# Altium PCB Glove_Row.PcbDoc (part 1 of 2)
Units mm, origin at the board's own origin, x right, y up, seen from the top; angles counter-clockwise.
Board outline 47.7 x 64 mm, 2 copper layers (Top Layer, Bottom Layer); 61 components, 194 nets, 577 pads, 247 vias.
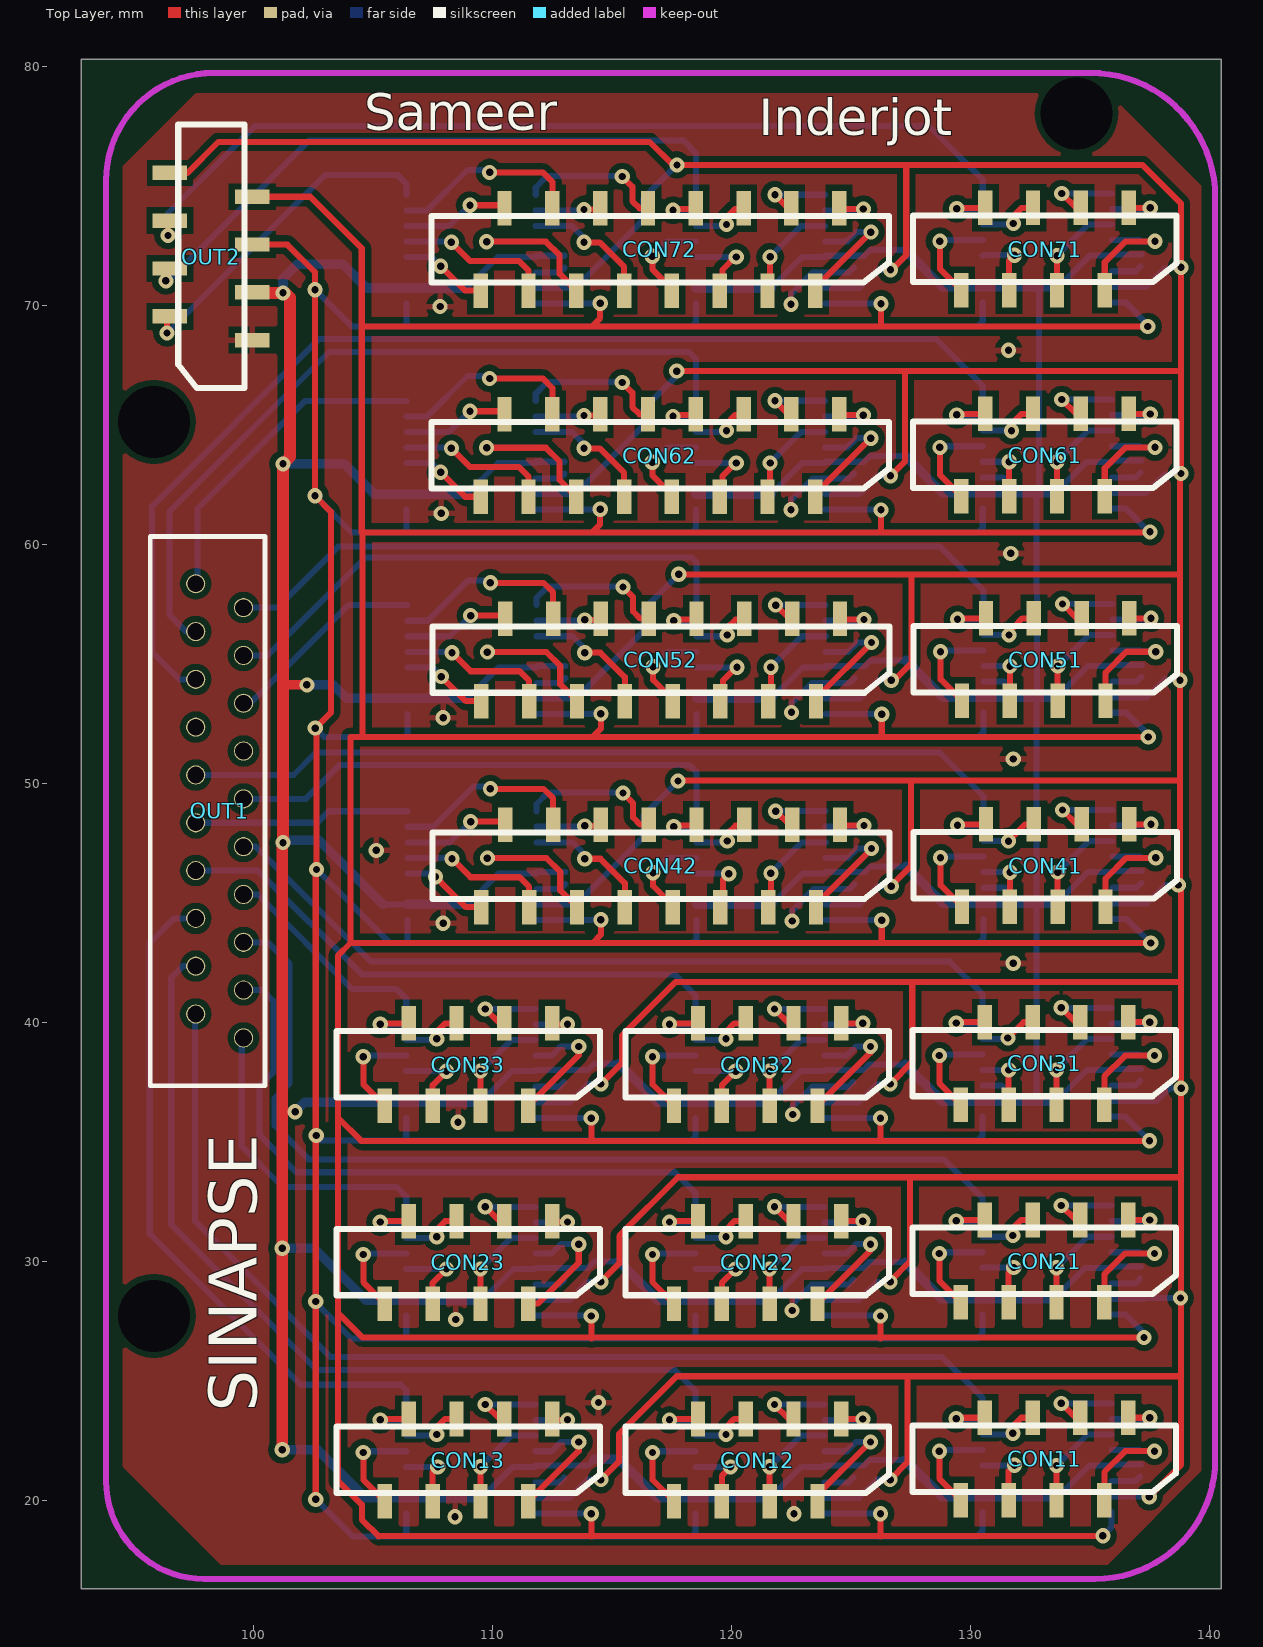
[diagram p0: Top Layer view]
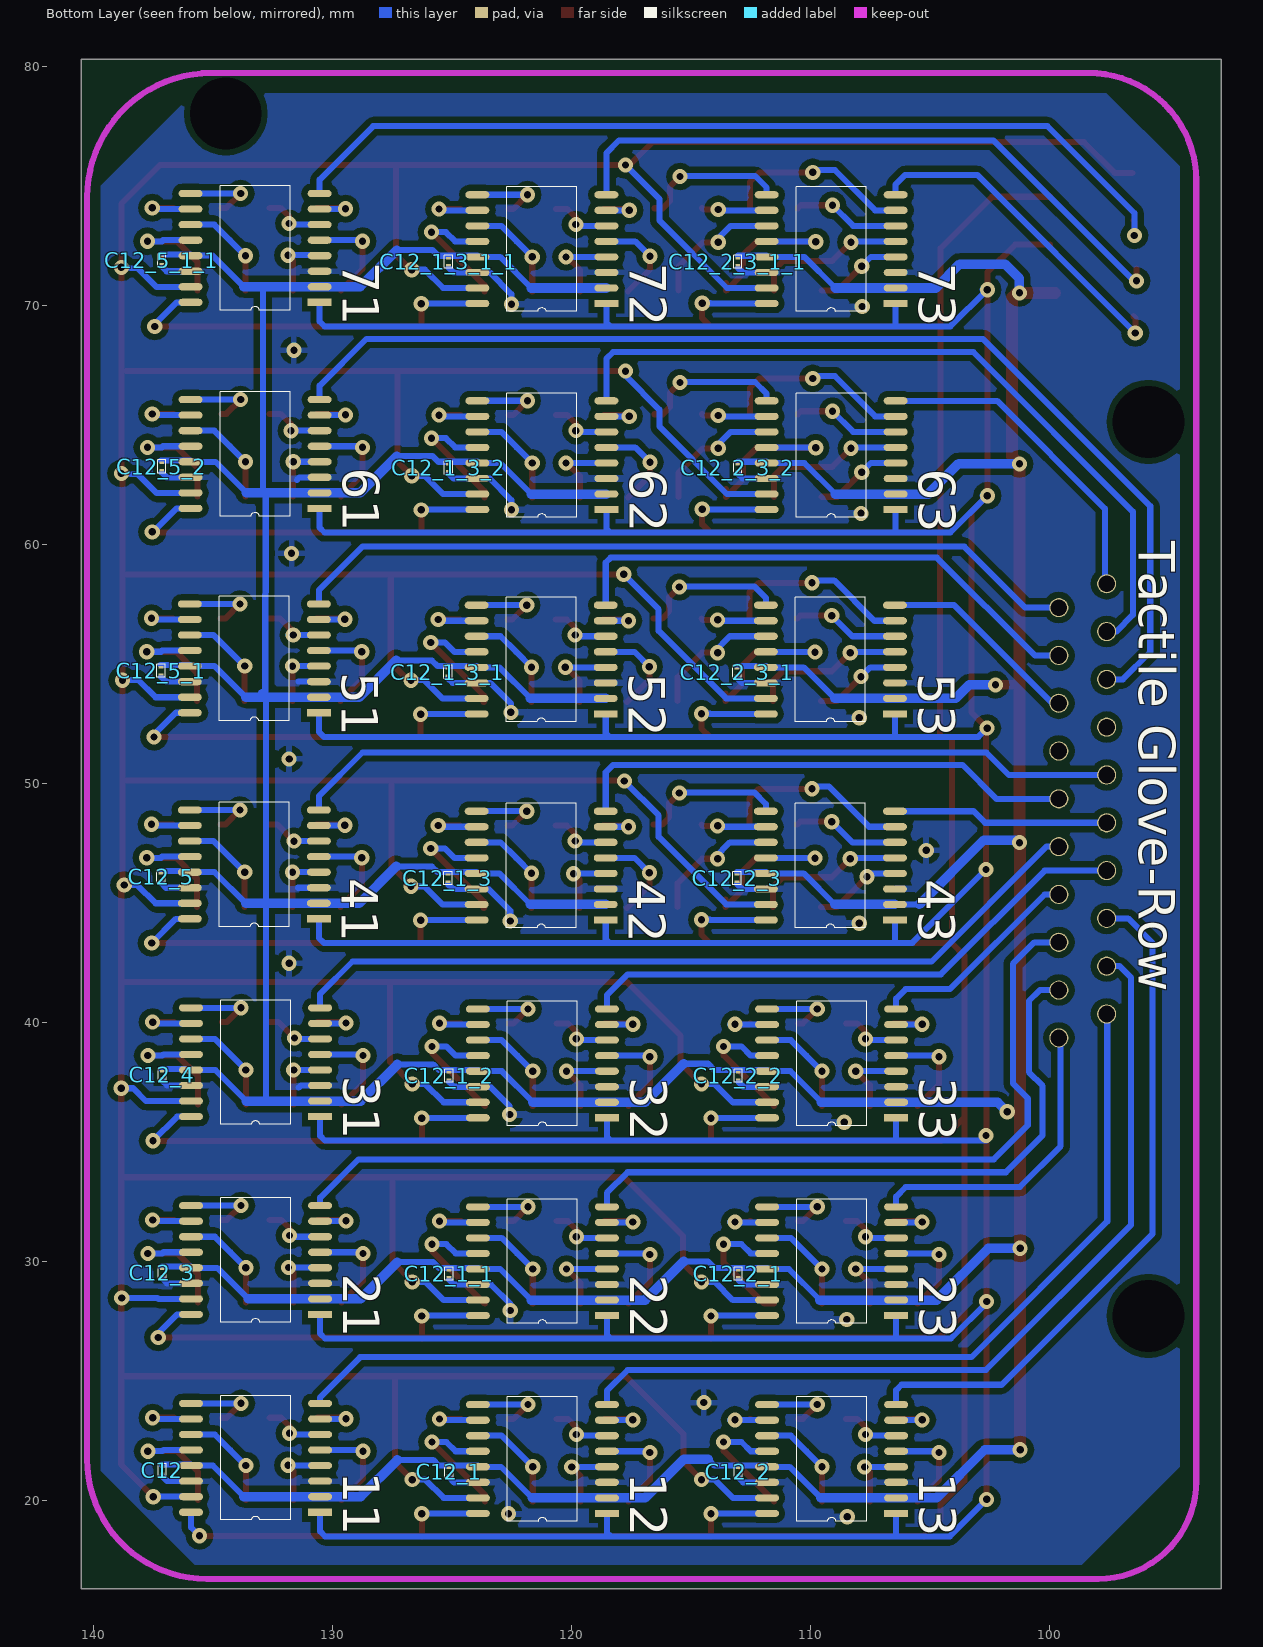
[diagram p1: Bottom Layer view, seen from below]

## Layer stack, top to bottom
Top Solder: solder mask 0.0102, Solder Resist, Dk 3.5
Top Layer: signal copper 0.0356
Dielectric 1: dielectric 0.32, FR-4, Dk 4.8
Bottom Layer: signal copper 0.0356
Bottom Solder: solder mask 0.0102, Solder Resist, Dk 3.5

## Board outline
92.8,16.3 140.5,16.3 140.5,80.3 92.8,80.3

## Design rules (kind name [scope] priority, off if disabled: settings)
Clearance [All] p1: gap=0.254 except(0.1: SMDPad-SMDPad THPad-THPad SMDPad-THPad; 0.2: Arc-Arc Arc-Track Arc-SMDPad Arc-Via THPad-Via Via-Via Track-SMDPad Track-Track SMDPad-Via Track-Via Track-THPad Arc-THPad)
HoleSize [All] p1: absolutevalues=TRUE maxlimit=6 minlimit=0.3 maxpercent=80.000 minpercent=20.000
HoleToHoleClearance [All] p1: gap=0.3 allowstackedmicrovias=TRUE
MinimumSolderMaskSliver [All] p1: minsoldermaskwidth=0
PolygonConnect [All] p1: connectstyle=Relief reliefconductorwidth=0.254 reliefentries=4 polygonreliefangle="90 Angle" airgapwidth=0.254
RoutingVias [All] p1: holewidth=0.305 width=0.635 viastyle="Through Hole" minholewidth=0.305 minwidth=0.635 maxholewidth=0.711 maxwidth=1.27
SilkToSilkClearance [All] p1: silktosilkclearance=0
SilkToSolderMaskClearance [IsPad] p1: minsilkscreentomaskgap=0 clearancetoexposedcopper=TRUE
SolderMaskExpansion [All] p1: expansion=0.05
UnpouredPolygon [All] p1: allowunpoured=FALSE
Width [All] p1: maxlimit=1 minlimit=0.2 preferedwidth=0.254
24 further rules are at their usual default settings.

## Components (designator, comment, footprint, x,y, rotation, side; value= is the part's Value field where it differs from the comment)
11 "ADG708" TSSOP16 130.502,19.509 r0 bottom (schematic designator MUX3)
12 "ADG708" TSSOP16 118.502,19.459 r0 bottom (schematic designator MUX3)
13 "ADG708" TSSOP16 106.402,19.459 r0 bottom (schematic designator MUX3)
21 "ADG708" TSSOP16 130.502,27.784 r0 bottom (schematic designator MUX3)
22 "ADG708" TSSOP16 118.502,27.734 r0 bottom (schematic designator MUX3)
23 "ADG708" TSSOP16 106.402,27.734 r0 bottom (schematic designator MUX3)
31 "ADG708" TSSOP16 130.502,36.059 r0 bottom (schematic designator MUX3)
32 "ADG708" TSSOP16 118.502,36.009 r0 bottom (schematic designator MUX3)
33 "ADG708" TSSOP16 106.402,36.009 r0 bottom (schematic designator MUX3)
41 "ADG708" TSSOP16 130.552,44.334 r0 bottom (schematic designator MUX3)
42 "ADG708" TSSOP16 118.552,44.284 r0 bottom (schematic designator MUX3)
43 "ADG708" TSSOP16 106.452,44.284 r0 bottom (schematic designator MUX3)
51 "ADG708" TSSOP16 130.552,52.954 r0 bottom (schematic designator MUX3)
52 "ADG708" TSSOP16 118.552,52.904 r0 bottom (schematic designator MUX3)
53 "ADG708" TSSOP16 106.452,52.904 r0 bottom (schematic designator MUX3)
61 "ADG708" TSSOP16 130.522,61.504 r0 bottom (schematic designator MUX3)
62 "ADG708" TSSOP16 118.522,61.454 r0 bottom (schematic designator MUX3)
63 "ADG708" TSSOP16 106.422,61.454 r0 bottom (schematic designator MUX3)
71 "ADG708" TSSOP16 130.522,70.124 r0 bottom (schematic designator MUX3)
72 "ADG708" TSSOP16 118.522,70.074 r0 bottom (schematic designator MUX3)
73 "ADG708" TSSOP16 106.422,70.074 r0 bottom (schematic designator MUX3)
C12 "Cap" 0402 137.106,21.261 r90 bottom (schematic designator C3)
C12_1 "Cap" 0402 125.106,21.211 r90 bottom (schematic designator C3)
C12_1_1 "Cap" 0402 125.106,29.486 r90 bottom (schematic designator C3)
C12_1_2 "Cap" 0402 125.106,37.761 r90 bottom (schematic designator C3)
C12_1_3 "Cap" 0402 125.156,46.036 r90 bottom (schematic designator C3)
C12_1_3_1 "Cap" 0402 125.156,54.656 r90 bottom (schematic designator C3)
C12_1_3_1_1 "Cap" 0402 125.126,71.826 r90 bottom (schematic designator C3)
C12_1_3_2 "Cap" 0402 125.126,63.206 r90 bottom (schematic designator C3)
C12_2 "Cap" 0402 113.006,21.211 r90 bottom (schematic designator C3)
C12_2_1 "Cap" 0402 113.006,29.486 r90 bottom (schematic designator C3)
C12_2_2 "Cap" 0402 113.006,37.761 r90 bottom (schematic designator C3)
C12_2_3 "Cap" 0402 113.056,46.036 r90 bottom (schematic designator C3)
C12_2_3_1 "Cap" 0402 113.056,54.656 r90 bottom (schematic designator C3)
C12_2_3_1_1 "Cap" 0402 113.026,71.826 r90 bottom (schematic designator C3)
C12_2_3_2 "Cap" 0402 113.026,63.206 r90 bottom (schematic designator C3)
C12_3 "Cap" 0402 137.106,29.536 r90 bottom (schematic designator C3)
C12_4 "Cap" 0402 137.106,37.811 r90 bottom (schematic designator C3)
C12_5 "Cap" 0402 137.156,46.086 r90 bottom (schematic designator C3)
C12_5_1 "Cap" 0402 137.156,54.706 r90 bottom (schematic designator C3)
C12_5_1_1 "Cap" 0402 137.126,71.876 r90 bottom (schematic designator C3)
C12_5_2 "Cap" 0402 137.126,63.256 r90 bottom (schematic designator C3)
CON11 "FFC_8POS" FFC_SMD_8_1 136.606,23.461 r180 top (schematic designator CON2)
CON12 "FFC_8POS" FFC_SMD_8_1 124.606,23.411 r180 top (schematic designator CON2)
CON13 "FFC_8POS" FFC_SMD_8_1 112.506,23.411 r180 top (schematic designator CON2)
CON21 "FFC_8POS" FFC_SMD_8_1 136.606,31.736 r180 top (schematic designator CON2)
CON22 "FFC_8POS" FFC_SMD_8_1 124.606,31.686 r180 top (schematic designator CON2)
CON23 "FFC_8POS" FFC_SMD_8_1 112.506,31.686 r180 top (schematic designator CON2)
CON31 "FFC_8POS" FFC_SMD_8_1 136.606,40.011 r180 top (schematic designator CON2)
CON32 "FFC_8POS" FFC_SMD_8_1 124.606,39.961 r180 top (schematic designator CON2)
CON33 "FFC_8POS" FFC_SMD_8_1 112.506,39.961 r180 top (schematic designator CON2)
CON41 "FFC_8POS" FFC_SMD_8_1 136.656,48.286 r180 top (schematic designator CON2)
CON42 "" FFC_SMD_16_1 124.546,48.271 r180 top
CON51 "FFC_8POS" FFC_SMD_8_1 136.656,56.906 r180 top (schematic designator CON2)
CON52 "" FFC_SMD_16_1 124.546,56.891 r180 top
CON61 "FFC_8POS" FFC_SMD_8_1 136.626,65.456 r180 top (schematic designator CON2)
CON62 "" FFC_SMD_16_1 124.516,65.441 r180 top
CON71 "FFC_8POS" FFC_SMD_8_1 136.626,74.076 r180 top (schematic designator CON2)
CON72 "" FFC_SMD_16_1 124.516,74.061 r180 top
OUT1 "" FFC_THT_20_1 99.596,39.351 r90 top
OUT2 "" FFC_SMD_8_1 99.966,68.541 r90 top

## Footprints (in the part's own frame and the unit in brackets; to place one, negate y for a bottom-side part, rotate by r counter-clockwise, add the part's x,y. Pads: shape width x height; smd on the part's side, far side on the other; paste and mask are expansions set on the pad)
0402 [mm]
  rect 0.1x0.2 smd mask+0.05: 1(-0.15,0) 2(0.15,0)
  silkscreen extent -0.28,-0.18 0.28,0.18
FFC_SMD_8_1 [mm]
  rect 0.6x1.45 smd: 1(0,0) 2(1,3.45) 3(2,0) 4(3,3.45) 5(4,0) 6(5,3.45) 7(6,0) 8(7,3.45)
  silkscreen extent -2,0.33 9.03,3.1
FFC_SMD_16_1 [mm]
  rect 0.6x1.45 smd: 1(0,0) 2(1,3.45) 3(2,0) 4(3,3.45) 5(4,0) 6(5,3.45) 7(6,0) 8(7,3.45) 9(8,0) 10(9,3.45) 11(10,0) 12(11,3.45) 13(12,0) 14(13,3.45) 15(14,0) 16(15,3.45)
  silkscreen extent -2.07,0.33 17.05,3.1
FFC_THT_20_1 [mm]
  round 0.8 hole 0.7 mask+0.2: 1(0,0) 2(1,2) 3(2,0) 4(3,2) 5(4,0) 6(5,2) 7(6,0) 8(7,2) 9(8,0) 10(9,2) 11(10,0) 12(11,2) 13(12,0) 14(13,2) 15(14,0) 16(15,2) 17(16,0) 18(17,2) 19(18,0) 20(19,2)
  silkscreen extent -2,-0.9 20.98,3.9
TSSOP16 [mm]
  rect 1x0.3 smd mask+0.075: 1(0,0)
  oval 1x0.3 smd mask+0.075: 2(0,-0.65) 3(0,-1.3) 4(0,-1.95) 5(0,-2.6) 6(0,-3.25) 7(0,-3.9) 8(0,-4.55) 9(5.4,-4.55) 10(5.4,-3.9) 11(5.4,-3.25) 12(5.4,-2.6) 13(5.4,-1.95) 14(5.4,-1.3) 15(5.4,-0.65) 16(5.4,0)
  silkscreen extent 1.23,-4.88 4.17,0.33

## Part data
C12 C12_1 C12_1_1 C12_1_2 C12_1_3 C12_1_3_1 C12_1_3_1_1 C12_1_3_2 C12_2 C12_2_1 C12_2_2 C12_2_3 C12_2_3_1 C12_2_3_1_1 C12_2_3_2 C12_3 C12_4 C12_5 C12_5_1 C12_5_1_1 C12_5_2: "Capacitor"
CON11 CON12 CON13 CON21 CON22 CON23 CON31 CON32 CON33 CON41 CON51 CON61 CON71 OUT2: library part FFC_8POPS
CON42 CON52 CON62 CON72: library part FFC_16POS
OUT1: library part FFC_20POS

## Free pads (board coordinates)
  round 0 hole 3: ""(95.846,27.721) ""(95.846,65.121) ""(134.446,78.021)

## Via types
v1: diameter 0.635, hole 0.305, Top Layer to Bottom Layer, 247 vias

## Nets (pads, with @x,y where several pads share a name; then routed paths per layer and width w, separated by ;. In a path a pad name is that pad's centre, name@x,y a point inside that pad or via, vN(x,y) a via of type N, cw(c..) or ccw(c..) an arc to the next point about the centre after c; other vN are vias at no path point)
3V3: 11.2 11.13 12.2 12.13 13.2 13.13 21.2 21.13 22.2 22.13 23.2 23.13 31.2 31.13 32.2 32.13 33.2 33.13 41.2 41.13 42.2 42.13 43.2 43.13 51.2 51.13 52.2 52.13 53.2 53.13 61.2 61.13 62.2 62.13 63.2 63.13 71.2 71.13 72.2 72.13 73.2 73.13 C12.2 C12_1.2 C12_1_1.2 C12_1_2.2 C12_1_3.2 C12_1_3_1.2 C12_1_3_1_1.2 C12_1_3_2.2 C12_2.2 C12_2_1.2 C12_2_2.2 C12_2_3.2 C12_2_3_1.2 C12_2_3_1_1.2 C12_2_3_2.2 C12_3.2 C12_4.2 C12_5.2 C12_5_1.2 C12_5_1_1.2 C12_5_2.2 OUT2.3 | length 337.6
  Top Layer w0.254: 101.216,36.221 101.254,36.259 v1(101.754,36.259) ; v1(101.246,70.521) v1@101.346,70.521
  Top Layer w0.4: 101.246,54.121 v1(102.246,54.121)
  Top Layer w0.5: OUT2.3@99.746,70.521 v1(101.246,70.521) ; v1(101.216,22.121) v1(101.216,30.551) 101.216,36.221 v1@101.216,47.471 ; v1(101.246,47.521) 101.246,54.121 v1(101.246,63.366) 101.546,63.666 101.546,70.321 v1@101.346,70.521
  Bottom Layer w0.25: 105.433,44.934 43.2@106.452,44.934 ; 108.939,62.104 110.239,63.404 63.13@111.822,63.404 ; 108.939,70.724 110.239,72.024 73.13@111.822,72.024 ; 108.969,44.934 110.269,46.234 43.13@111.852,46.234 ; 108.969,53.554 110.269,54.854 53.13@111.852,54.854 ; 109.524,36.659 110.824,37.959 33.13@111.802,37.959 ; 109.559,20.109 110.859,21.409 13.13@111.802,21.409 ; 109.589,28.384 110.889,29.684 23.13@111.802,29.684 ; 121.594,36.659 122.894,37.959 32.13@123.902,37.959 ; 121.634,20.109 122.934,21.409 12.13@123.902,21.409 ; 121.669,28.384 122.969,29.684 22.13@123.902,29.684 ; 121.669,62.104 122.969,63.404 62.13@123.922,63.404 ; 121.669,70.724 122.969,72.024 72.13@123.922,72.024 ; 121.699,44.934 122.999,46.234 42.13@123.952,46.234 ; 121.699,53.554 122.999,54.854 52.13@123.952,54.854 ; 133.509,28.434 134.809,29.734 21.13@135.902,29.734 ; 133.579,62.154 134.879,63.454 61.13@135.922,63.454 ; 133.584,36.709 134.884,38.009 31.13@135.902,38.009 ; 133.609,53.604 134.909,54.904 51.13@135.952,54.904 ; 133.619,44.984 134.919,46.284 41.13@135.952,46.284 ; 133.684,20.159 134.984,21.459 11.13@135.902,21.459 ; 133.699,70.774 134.999,72.074 71.13@135.922,72.074
  Bottom Layer w0.254: 13.13@111.802,21.459 114.009,21.459 114.271,21.721 ; 23.13@111.802,29.734 114.009,29.734 114.271,29.996 115.296,29.996 ; 33.13@111.802,38.009 114.009,38.009 114.271,38.271 115.296,38.271 ; 63.13@111.822,63.454 113.026,63.454 ; 73.13@111.822,72.074 113.026,72.074 ; 43.13@111.852,46.284 113.056,46.284 ; 53.13@111.852,54.904 113.056,54.904 ; 12.13@123.902,21.459 125.534,21.459 125.771,21.696 127.271,21.696 ; 22.13@123.902,29.734 125.534,29.734 125.771,29.971 127.271,29.971 ; 32.13@123.902,38.009 125.534,38.009 125.771,38.246 127.271,38.246 ; 62.13@123.922,63.454 125.554,63.454 125.791,63.691 127.291,63.691 ; 72.13@123.922,72.074 125.554,72.074 125.791,72.311 127.291,72.311 ; 42.13@123.952,46.284 125.584,46.284 125.821,46.521 127.321,46.521 ; 52.13@123.952,54.904 125.584,54.904 125.821,55.141 127.321,55.141 ; 132.771,36.709 132.771,44.984 132.771,53.546 ; 132.776,62.154 132.796,53.756 ; 132.883,62.154 132.883,70.716 ; 11.13@135.902,21.509 137.133,21.509 ; 21.13@135.902,29.784 137.133,29.784 ; 31.13@135.902,38.059 137.133,38.059 ; 61.13@135.922,63.504 137.153,63.504 ; 71.13@135.922,72.124 137.153,72.124 ; 41.13@135.952,46.334 137.183,46.334 ; 51.13@135.952,54.954 137.183,54.954
  Bottom Layer w0.4: v1(101.216,22.121) 102.696,22.121 104.708,20.109 13.2@106.402,20.109 109.559,20.109 ; v1(101.216,30.551) 102.541,30.551 104.708,28.384 23.2@106.402,28.384 109.589,28.384 ; v1@101.246,47.446 101.421,47.621 102.746,47.621 105.433,44.934 ; v1(101.246,63.366) 101.246,63.376 103.791,63.376 105.063,62.104 63.2@106.422,62.104 108.939,62.104 ; v1(101.246,70.521) 101.246,71.121 101.846,71.721 103.746,71.721 104.743,70.724 73.2@106.422,70.724 108.939,70.724 ; v1(101.754,36.259) 102.154,36.659 33.2@106.402,36.659 109.524,36.659 ; v1(102.246,54.121) 103.346,54.121 103.913,53.554 53.2@106.452,53.554 108.969,53.554 ; 43.2@106.452,44.934 108.969,44.934 ; 114.271,21.721 115.296,21.721 116.908,20.109 12.2@118.502,20.109 121.634,20.109 ; 115.296,29.996 116.908,28.384 22.2@118.502,28.384 121.669,28.384 ; 115.296,38.271 116.908,36.659 32.2@118.502,36.659 121.594,36.659 ; 62.2@118.522,62.104 121.669,62.104 ; 72.2@118.522,70.724 121.669,70.724 ; 42.2@118.552,44.934 121.699,44.934 ; 52.2@118.552,53.554 121.699,53.554 ; 127.271,21.696 128.808,20.159 11.2@130.502,20.159 133.684,20.159 ; 127.271,29.971 128.808,28.434 21.2@130.502,28.434 133.509,28.434 ; 127.271,38.246 128.808,36.709 31.2@130.502,36.709 132.771,36.709 133.584,36.709 ; 127.291,63.691 128.828,62.154 61.2@130.522,62.154 133.579,62.154 ; 127.291,72.311 128.828,70.774 71.2@130.522,70.774 133.699,70.774 ; 127.321,46.521 128.858,44.984 41.2@130.552,44.984 132.771,44.984 133.619,44.984 ; 127.321,55.141 128.858,53.604 51.2@130.552,53.604 133.609,53.604 ; 132.741,53.576 132.921,53.756
GND: 11.3 11.14 12.3 12.14 13.3 13.14 21.3 21.14 22.3 22.14 23.3 23.14 31.3 31.14 32.3 32.14 33.3 33.14 41.3 41.14 42.3 42.14 43.3 43.14 51.3 51.14 52.3 52.14 53.3 53.14 61.3 61.14 62.3 62.14 63.3 63.14 71.3 71.14 72.3 72.14 73.3 73.14 C12.1 C12_1.1 C12_1_1.1 C12_1_2.1 C12_1_3.1 C12_1_3_1.1 C12_1_3_1_1.1 C12_1_3_2.1 C12_2.1 C12_2_1.1 C12_2_2.1 C12_2_3.1 C12_2_3_1.1 C12_2_3_1_1.1 C12_2_3_2.1 C12_3.1 C12_4.1 C12_5.1 C12_5_1.1 C12_5_1_1.1 C12_5_2.1 OUT2.1 | length 43.5
  Bottom Layer w0.254: 13.14@111.802,20.759 112.804,20.759 113.006,20.961 ; 23.14@111.802,29.034 112.804,29.034 113.006,29.236 ; 33.14@111.802,37.309 112.804,37.309 113.006,37.511 ; 63.14@111.822,62.754 112.824,62.754 113.026,62.956 ; 73.14@111.822,71.374 112.824,71.374 113.026,71.576 ; 43.14@111.852,45.584 112.854,45.584 113.056,45.786 ; 53.14@111.852,54.204 112.854,54.204 113.056,54.406 ; v1(122.496,61.446) 122.496,61.846 123.404,62.754 62.14@123.922,62.754 124.924,62.754 125.126,62.956 ; v1(122.496,70.046) 122.496,70.471 123.399,71.374 72.14@123.922,71.374 124.924,71.374 125.126,71.576 ; v1(122.521,52.971) 122.521,53.346 123.379,54.204 52.14@123.952,54.204 124.954,54.204 125.156,54.406 ; v1(122.546,27.946) 122.546,28.221 123.359,29.034 22.14@123.902,29.034 124.904,29.034 125.106,29.236 ; v1(122.546,44.246) 122.546,44.671 123.459,45.584 42.14@123.952,45.584 124.954,45.584 125.156,45.786 ; v1(122.571,36.146) 122.571,36.496 123.384,37.309 32.14@123.902,37.309 124.904,37.309 125.106,37.511 ; 12.14@123.902,20.759 124.904,20.759 125.106,20.961 ; 31.3@130.502,37.359 131.308,37.359 131.396,37.271 ; 61.3@130.522,62.804 131.363,62.804 131.471,62.696 ; 41.3@130.552,45.634 131.433,45.634 ; 51.3@130.552,54.254 131.413,54.254 ; 11.14@135.902,20.809 136.904,20.809 137.106,21.011 ; 21.14@135.902,29.084 136.904,29.084 137.106,29.286 ; 31.14@135.902,37.359 136.904,37.359 137.106,37.561 ; 61.14@135.922,62.804 136.924,62.804 137.126,63.006 ; 71.14@135.922,71.424 136.924,71.424 137.126,71.626 ; 41.14@135.952,45.634 136.954,45.634 137.156,45.836 ; 51.14@135.952,54.254 136.954,54.254 137.156,54.456
  other v1: 108.446,19.321 122.621,19.446 114.446,24.096 108.471,27.571 108.571,35.821 131.796,42.471 107.946,44.146 105.146,47.196 131.796,51.021 107.946,52.746 131.696,59.621 107.871,61.296 131.596,68.121 107.821,69.946
M1: 11.8 OUT1.2 | length 44.9
  Bottom Layer w0.254: OUT1.2@97.571,40.351 97.571,31.676 103.25,25.997 128.821,25.997 130.502,24.316 11.8@130.502,24.059
M2: 12.8 OUT1.4 | length 36.9
  Bottom Layer w0.254: OUT1.4@97.596,42.351 97.051,42.351 96.571,41.871 96.571,31.536 102.65,25.457 117.635,25.457 118.502,24.59 12.8@118.502,24.009
M3: 13.8 OUT1.6 | length 28.6
  Bottom Layer w0.254: OUT1.6@97.596,44.351 96.701,44.351 95.671,43.321 95.671,31.156 101.987,24.84 106.177,24.84 106.402,24.615 13.8@106.402,24.009
M4: 21.8 OUT1.5 | length 40.5
  Bottom Layer w0.254: OUT1.5@99.596,43.351 100.616,43.351 101.521,42.446 101.521,37.446 100.896,36.821 100.896,35.696 102.32,34.272 128.895,34.272 130.502,32.665 21.8@130.502,32.334
M5: 22.8 OUT1.3 | length 27.1
  Bottom Layer w0.254: OUT1.3@99.596,41.351 100.391,41.351 100.846,40.896 100.846,37.921 100.271,37.346 100.271,35.271 101.81,33.732 117.635,33.732 118.502,32.865 22.8@118.502,32.284
M6: 23.8 OUT1.1 | length 12.7
  Bottom Layer w0.254: OUT1.1@99.521,39.351 99.521,34.821 101.227,33.115 106.002,33.115 106.402,32.715 23.8@106.402,32.284
M7: 31.8 OUT1.9 | length 34
  Bottom Layer w0.254: OUT1.9@99.596,47.351 100.116,47.351 104.92,42.547 129.145,42.547 130.502,41.19 31.8@130.502,40.609
M8: 32.8 OUT1.8 | length 23.6
  Bottom Layer w0.254: OUT1.8@97.596,46.351 100.191,46.351 104.535,42.007 117.635,42.007 118.502,41.14 32.8@118.502,40.559
M9: 33.8 OUT1.7 | length 9
  Bottom Layer w0.254: OUT1.7@99.596,45.351 100.191,45.351 104.152,41.39 106.002,41.39 106.402,40.99 33.8@106.402,40.559
M10: 41.8 OUT1.12 | length 34.7
  Bottom Layer w0.254: OUT1.12@97.596,50.351 101.686,50.351 102.626,51.291 128.726,51.291 130.552,49.465 41.8@130.552,48.884
M11: 42.8 OUT1.11 | length 21.3
  Bottom Layer w0.254: OUT1.11@99.596,49.351 102.206,49.351 103.626,50.771 118.246,50.771 118.552,50.465 42.8@118.552,48.834
M12: 43.8 OUT1.10 | length 9.1
  Bottom Layer w0.254: OUT1.10@97.596,48.351 102.676,48.351 103.159,48.834 43.8@106.452,48.834
M13: 51.8 OUT1.19 | length 33.3
  Bottom Layer w0.254: OUT1.19@99.596,57.351 101.001,57.351 103.551,59.901 128.736,59.901 130.552,58.085 51.8@130.552,57.504
M14: 52.8 OUT1.17 | length 22.5
  Bottom Layer w0.254: OUT1.17@99.596,55.351 100.601,55.351 104.696,59.446 118.346,59.446 118.552,59.24 52.8@118.552,57.454
M15: 53.8 OUT1.15 | length 8.6
  Bottom Layer w0.254: OUT1.15@99.596,53.351 99.876,53.351 103.979,57.454 53.8@106.452,57.454
M16: 61.8 OUT1.16 | length 47.4
  Bottom Layer w0.254: OUT1.16@97.596,54.351 96.916,54.351 95.771,55.496 95.771,61.596 102.771,68.596 128.561,68.596 130.522,66.635 61.8@130.522,66.054
M17: 62.8 OUT1.18 | length 32.4
  Bottom Layer w0.254: OUT1.18@97.596,56.351 97.191,56.351 96.496,57.046 96.496,61.371 103.171,68.046 118.246,68.046 118.522,67.77 62.8@118.522,66.004
M18: 63.8 OUT1.20 | length 13.8
  Bottom Layer w0.254: OUT1.20@97.671,58.351 97.671,61.496 102.179,66.004 63.8@106.422,66.004
M19: 71.8 OUT2.6 | length 38.7
  Top Layer w0.254: v1(96.436,72.921) 96.436,73.511 OUT2.6@96.466,73.541
  Bottom Layer w0.254: v1(96.436,72.921) 96.436,73.861 100.071,77.496 128.281,77.496 130.522,75.255 71.8@130.522,74.674
M20: 72.8 OUT2.4 | length 27
  Top Layer w0.254: v1(96.346,71.021) OUT2.4@96.346,71.541
  Bottom Layer w0.254: v1@96.466,71.021 102.341,76.896 117.996,76.896 118.522,76.37 72.8@118.522,74.624
M21: 73.8 OUT2.2 | length 14.2
  Top Layer w0.254: v1(96.396,68.841) 96.396,69.471 OUT2.2@96.466,69.541
  Bottom Layer w0.254: v1@96.396,68.925 v1(96.396,68.841) 103.01,75.455 106.022,75.455 106.422,75.055 73.8@106.422,74.624
R111: 11.4 CON11.6 | length 3
  Top Layer w0.254: CON11.6@131.656,20.061 CON11.6@131.606,20.011 131.606,21.231 v1(131.846,21.471)
  Bottom Layer w0.254: 11.4@130.502,21.459 130.514,21.471 v1(131.846,21.471)
R112: 11.5 CON11.8 | length 4.2
  Top Layer w0.254: v1(128.706,22.061) 128.706,20.911 CON11.8@129.606,20.011
  Bottom Layer w0.254: v1(128.706,22.061) 128.754,22.109 11.5@130.502,22.109
R113: 11.6 CON11.5 | length 2.5
  Top Layer w0.254: v1(131.781,22.811) 131.781,23.111 132.131,23.461 CON11.5@132.606,23.461
  Bottom Layer w0.254: 11.6@130.502,22.759 v1@131.781,22.759
R114: 11.7 CON11.7 | length 2.3
  Top Layer w0.254: v1@129.416,23.461 CON11.7@130.606,23.461
  Bottom Layer w0.254: v1@129.416,23.409 11.7@130.502,23.409
  other v1: 129.416,23.421
R115: 11.12 CON11.2 | length 5.5
  Top Layer w0.254: CON11.2@135.606,20.011 135.606,21.191 136.476,22.061 v1(137.706,22.061)
  Bottom Layer w0.254: 11.12@135.902,22.109 137.058,22.109 137.106,22.061 v1(137.706,22.061)
R116: 11.11 CON11.4 | length 4.3
  Top Layer w0.254: CON11.4@133.606,20.011 v1(133.606,21.461)
  Bottom Layer w0.254: v1(133.606,21.461) 134.254,22.109 134.904,22.759 11.11@135.902,22.759
R117: 11.10 CON11.1 | length 2.5
  Top Layer w0.254: CON11.1@136.606,23.461 v1(137.506,23.461)
  Bottom Layer w0.254: 11.10@135.902,23.409 137.454,23.409 v1(137.506,23.461)
R118: 11.9 CON11.3 | length 3.1
  Top Layer w0.254: v1(133.806,24.061) 134.406,23.461 CON11.3@134.606,23.461
  Bottom Layer w0.254: v1(133.806,24.061) 11.9@135.9,24.061
R121: 12.4 CON12.6 | length 3.1
  Top Layer w0.254: CON12.6@119.656,20.011 CON12.6@119.606,19.961 119.606,21.031 v1(119.971,21.396)
  Bottom Layer w0.254: 12.4@118.502,21.409 118.515,21.396 v1(119.971,21.396)
R122: 12.5 CON12.8 | length 4.2
  Top Layer w0.254: v1(116.706,22.011) 116.706,20.861 CON12.8@117.606,19.961
  Bottom Layer w0.254: v1(116.706,22.011) 116.754,22.059 12.5@118.502,22.059
R123: 12.6 CON12.5 | length 2.5
  Top Layer w0.254: v1(119.781,22.761) 119.781,23.061 120.131,23.411 CON12.5@120.606,23.411
  Bottom Layer w0.254: 12.6@118.502,22.709 v1@119.781,22.709
R124: 12.7 CON12.7 | length 2.3
  Top Layer w0.254: v1@117.416,23.411 CON12.7@118.606,23.411
  Bottom Layer w0.254: v1@117.416,23.359 12.7@118.502,23.359
  other v1: 117.416,23.371
R125: 12.12 CON12.2 | length 5.5
  Top Layer w0.254: CON12.2@123.606,19.961 123.606,20.231 v1(125.821,22.446)
  Bottom Layer w0.254: 12.12@123.902,22.059 124.834,22.059 125.221,22.446 v1(125.821,22.446)
R126: 12.11 CON12.4 | length 4.3
  Top Layer w0.254: CON12.4@121.606,19.961 v1(121.606,21.411)
  Bottom Layer w0.254: v1(121.606,21.411) 122.254,22.059 122.904,22.709 12.11@123.902,22.709
R127: 12.10 CON12.1 | length 2.5
  Top Layer w0.254: CON12.1@124.606,23.411 v1(125.506,23.411)
  Bottom Layer w0.254: 12.10@123.902,23.359 125.454,23.359 v1(125.506,23.411)
R128: 12.9 CON12.3 | length 3.1
  Top Layer w0.254: v1(121.806,24.011) 122.406,23.411 CON12.3@122.606,23.411
  Bottom Layer w0.254: v1(121.806,24.011) 12.9@123.9,24.011
R131: 13.4 CON13.6 | length 2.9
  Top Layer w0.254: CON13.6@107.556,20.011 CON13.6@107.506,19.961 107.506,21.181 v1(107.721,21.396)
  Bottom Layer w0.254: 13.4@106.402,21.409 106.415,21.396 v1(107.721,21.396)
R132: 13.5 CON13.8 | length 4.2
  Top Layer w0.254: v1(104.606,22.011) 104.606,20.861 CON13.8@105.506,19.961
  Bottom Layer w0.254: v1(104.606,22.011) 104.654,22.059 13.5@106.402,22.059
R133: 13.6 CON13.5 | length 2.5
  Top Layer w0.254: v1(107.681,22.761) 107.681,23.061 108.031,23.411 CON13.5@108.506,23.411
  Bottom Layer w0.254: 13.6@106.402,22.709 v1@107.681,22.709
R134: 13.7 CON13.7 | length 2.3
  Top Layer w0.254: v1@105.316,23.411 CON13.7@106.506,23.411
  Bottom Layer w0.254: v1@105.316,23.359 13.7@106.402,23.359
  other v1: 105.316,23.371
R135: 13.12 CON13.2 | length 5.3
  Top Layer w0.254: CON13.2@111.506,19.961 113.621,22.076 v1(113.621,22.446)
  Bottom Layer w0.254: 13.12@111.802,22.059 112.484,22.059 112.871,22.446 v1(113.621,22.446)
R136: 13.11 CON13.4 | length 4.3
  Top Layer w0.254: CON13.4@109.506,19.961 v1(109.506,21.411)
  Bottom Layer w0.254: v1(109.506,21.411) 110.154,22.059 110.804,22.709 13.11@111.802,22.709
R137: 13.10 CON13.1 | length 2.4
  Top Layer w0.254: CON13.1@112.506,23.411 112.546,23.371 v1(113.146,23.371)
  Bottom Layer w0.254: 13.10@111.802,23.359 113.33,23.359 113.342,23.371 v1(113.146,23.371)
R138: 13.9 CON13.3 | length 3.1
  Top Layer w0.254: v1(109.706,24.011) 110.306,23.411 CON13.3@110.506,23.411
  Bottom Layer w0.254: v1(109.706,24.011) 13.9@111.8,24.011
R211: 21.4 CON21.6 | length 2.9
  Top Layer w0.254: CON21.6@131.656,28.336 CON21.6@131.606,28.286 131.606,29.531 v1(131.821,29.746)
  Bottom Layer w0.254: 21.4@130.502,29.734 130.514,29.746 v1(131.821,29.746)
R212: 21.5 CON21.8 | length 4.2
  Top Layer w0.254: v1(128.706,30.336) 128.706,29.186 CON21.8@129.606,28.286
  Bottom Layer w0.254: v1(128.706,30.336) 128.754,30.384 21.5@130.502,30.384
R213: 21.6 CON21.5 | length 2.5
  Top Layer w0.254: v1(131.781,31.086) 131.781,31.386 132.131,31.736 CON21.5@132.606,31.736
  Bottom Layer w0.254: 21.6@130.502,31.034 v1@131.781,31.034
R214: 21.7 CON21.7 | length 2.3
  Top Layer w0.254: v1@129.416,31.736 CON21.7@130.606,31.736
  Bottom Layer w0.254: v1@129.416,31.684 21.7@130.502,31.684
  other v1: 129.416,31.696
R215: 21.12 CON21.2 | length 5.5
  Top Layer w0.254: CON21.2@135.606,28.286 135.606,29.466 136.476,30.336 v1(137.706,30.336)
  Bottom Layer w0.254: 21.12@135.902,30.384 137.058,30.384 137.106,30.336 v1(137.706,30.336)
R216: 21.11 CON21.4 | length 4.3
  Top Layer w0.254: CON21.4@133.606,28.286 v1(133.606,29.736)
  Bottom Layer w0.254: v1(133.606,29.736) 134.254,30.384 134.904,31.034 21.11@135.902,31.034
R217: 21.10 CON21.1 | length 2.5
  Top Layer w0.254: CON21.1@136.606,31.736 v1(137.506,31.736)
  Bottom Layer w0.254: 21.10@135.902,31.684 137.454,31.684 v1(137.506,31.736)
R218: 21.9 CON21.3 | length 3.1
  Top Layer w0.254: v1(133.806,32.336) 134.406,31.736 CON21.3@134.606,31.736
  Bottom Layer w0.254: v1(133.806,32.336) 21.9@135.9,32.336
R221: 22.4 CON22.6 | length 3.4
  Top Layer w0.254: CON22.6@119.656,28.286 CON22.6@119.606,28.236 119.606,29.099 v1(120.191,29.684)
  Bottom Layer w0.254: 22.4@118.502,29.684 v1(120.191,29.684)
R222: 22.5 CON22.8 | length 4.2
  Top Layer w0.254: v1(116.706,30.286) 116.706,29.136 CON22.8@117.606,28.236
  Bottom Layer w0.254: v1(116.706,30.286) 116.754,30.334 22.5@118.502,30.334
R223: 22.6 CON22.5 | length 2.5
  Top Layer w0.254: v1(119.781,31.036) 119.781,31.336 120.131,31.686 CON22.5@120.606,31.686
  Bottom Layer w0.254: 22.6@118.502,30.984 v1@119.781,30.984
R224: 22.7 CON22.7 | length 2.3
  Top Layer w0.254: v1@117.416,31.686 CON22.7@118.606,31.686
  Bottom Layer w0.254: v1@117.416,31.634 22.7@118.502,31.634
  other v1: 117.416,31.646
R225: 22.12 CON22.2 | length 5.5
  Top Layer w0.254: CON22.2@123.606,28.236 125.821,30.451 v1(125.821,30.721)
  Bottom Layer w0.254: 22.12@123.902,30.334 124.834,30.334 125.221,30.721 v1(125.821,30.721)
R226: 22.11 CON22.4 | length 4.3
  Top Layer w0.254: CON22.4@121.606,28.236 v1(121.606,29.686)
  Bottom Layer w0.254: v1(121.606,29.686) 122.254,30.334 122.904,30.984 22.11@123.902,30.984
R227: 22.10 CON22.1 | length 2.5
  Top Layer w0.254: CON22.1@124.606,31.686 v1(125.506,31.686)
  Bottom Layer w0.254: 22.10@123.902,31.634 125.454,31.634 v1(125.506,31.686)
R228: 22.9 CON22.3 | length 3.1
  Top Layer w0.254: v1(121.806,32.286) 122.406,31.686 CON22.3@122.606,31.686
  Bottom Layer w0.254: v1(121.806,32.286) 22.9@123.9,32.286
R231: 23.4 CON23.6 | length 3.4
  Top Layer w0.254: CON23.6@107.556,28.286 CON23.6@107.506,28.236 107.506,29.099 v1(108.091,29.684)
  Bottom Layer w0.254: 23.4@106.402,29.684 v1(108.091,29.684)
R232: 23.5 CON23.8 | length 4.2
  Top Layer w0.254: v1(104.606,30.286) 104.606,29.136 CON23.8@105.506,28.236
  Bottom Layer w0.254: v1(104.606,30.286) 104.654,30.334 23.5@106.402,30.334
R233: 23.6 CON23.5 | length 2.5
  Top Layer w0.254: v1(107.681,31.036) 107.681,31.336 108.031,31.686 CON23.5@108.506,31.686
  Bottom Layer w0.254: 23.6@106.402,30.984 v1@107.681,30.984
R234: 23.7 CON23.7 | length 2.3
  Top Layer w0.254: v1@105.316,31.686 CON23.7@106.506,31.686
  Bottom Layer w0.254: v1@105.316,31.634 23.7@106.402,31.634
  other v1: 105.316,31.646
R235: 23.12 CON23.2 | length 5.6
  Top Layer w0.254: CON23.2@111.506,28.236 111.911,28.236 113.621,29.946 v1(113.621,30.721)
  Bottom Layer w0.254: 23.12@111.802,30.334 112.484,30.334 112.871,30.721 v1(113.621,30.721)
R236: 23.11 CON23.4 | length 4.3
  Top Layer w0.254: CON23.4@109.506,28.236 v1(109.506,29.686)
  Bottom Layer w0.254: v1(109.506,29.686) 110.154,30.334 110.804,30.984 23.11@111.802,30.984
R237: 23.10 CON23.1 | length 2.4
  Top Layer w0.254: CON23.1@112.506,31.686 112.546,31.646 v1(113.146,31.646)
  Bottom Layer w0.254: 23.10@111.802,31.634 113.33,31.634 113.342,31.646 v1(113.146,31.646)
R238: 23.9 CON23.3 | length 3.1
  Top Layer w0.254: v1(109.706,32.286) 110.306,31.686 CON23.3@110.506,31.686
  Bottom Layer w0.254: v1(109.706,32.286) 23.9@111.8,32.286
R311: 31.4 CON31.6 | length 2.6
  Top Layer w0.254: v1@131.606,38.007 CON31.6@131.606,36.561 CON31.6@131.656,36.611
  Bottom Layer w0.254: 31.4@130.502,38.009 v1(131.608,38.009)
R312: 31.5 CON31.8 | length 4.2
  Top Layer w0.254: v1(128.706,38.611) 128.706,37.461 CON31.8@129.606,36.561
  Bottom Layer w0.254: v1(128.706,38.611) 128.754,38.659 31.5@130.502,38.659
R313: 31.6 CON31.5 | length 2.5
  Top Layer w0.254: v1@131.571,39.451 v1(131.571,39.346) 132.236,40.011 CON31.5@132.606,40.011
  Bottom Layer w0.254: 31.6@130.502,39.309 v1@131.571,39.309
R314: 31.7 CON31.7 | length 2.3
  Top Layer w0.254: v1@129.416,40.011 CON31.7@130.606,40.011
  Bottom Layer w0.254: v1@129.416,39.959 31.7@130.502,39.959
  other v1: 129.416,39.971
R315: 31.12 CON31.2 | length 5.5
  Top Layer w0.254: CON31.2@135.606,36.561 135.606,37.741 136.476,38.611 v1(137.706,38.611)
  Bottom Layer w0.254: 31.12@135.902,38.659 137.058,38.659 137.106,38.611 v1(137.706,38.611)
R316: 31.11 CON31.4 | length 4.3
  Top Layer w0.254: CON31.4@133.606,36.561 v1(133.606,38.011)
  Bottom Layer w0.254: v1(133.606,38.011) 134.254,38.659 134.904,39.309 31.11@135.902,39.309
R317: 31.10 CON31.1 | length 2.5
  Top Layer w0.254: CON31.1@136.606,40.011 v1(137.506,40.011)
  Bottom Layer w0.254: 31.10@135.902,39.959 137.454,39.959 v1(137.506,40.011)
R318: 31.9 CON31.3 | length 3.1
  Top Layer w0.254: v1(133.806,40.611) 134.406,40.011 CON31.3@134.606,40.011
  Bottom Layer w0.254: v1(133.806,40.611) 31.9@135.9,40.611
R321: 32.4 CON32.6 | length 3.4
  Top Layer w0.254: CON32.6@119.656,36.561 CON32.6@119.606,36.511 119.606,37.374 v1(120.191,37.959)
  Bottom Layer w0.254: 32.4@118.502,37.959 v1(120.191,37.959)
R322: 32.5 CON32.8 | length 4.2
  Top Layer w0.254: v1(116.706,38.561) 116.706,37.411 CON32.8@117.606,36.511
  Bottom Layer w0.254: v1(116.706,38.561) 116.754,38.609 32.5@118.502,38.609
R323: 32.6 CON32.5 | length 2.5
  Top Layer w0.254: v1(119.781,39.311) 119.781,39.611 120.131,39.961 CON32.5@120.606,39.961
  Bottom Layer w0.254: 32.6@118.502,39.259 v1@119.781,39.259
R324: 32.7 CON32.7 | length 2.3
  Top Layer w0.254: v1@117.416,39.961 CON32.7@118.606,39.961
  Bottom Layer w0.254: v1@117.416,39.909 32.7@118.502,39.909
  other v1: 117.416,39.921
R325: 32.12 CON32.2 | length 5.5
  Top Layer w0.254: CON32.2@123.606,36.511 125.821,38.726 v1(125.821,38.996)
  Bottom Layer w0.254: 32.12@123.902,38.609 124.834,38.609 125.221,38.996 v1(125.821,38.996)
R326: 32.11 CON32.4 | length 4.3
  Top Layer w0.254: CON32.4@121.606,36.511 v1(121.606,37.961)
  Bottom Layer w0.254: v1(121.606,37.961) 122.254,38.609 122.904,39.259 32.11@123.902,39.259
R327: 32.10 CON32.1 | length 2.5
  Top Layer w0.254: CON32.1@124.606,39.961 v1(125.506,39.961)
  Bottom Layer w0.254: 32.10@123.902,39.909 125.454,39.909 v1(125.506,39.961)
R328: 32.9 CON32.3 | length 3.1
  Top Layer w0.254: v1(121.806,40.561) 122.406,39.961 CON32.3@122.606,39.961
  Bottom Layer w0.254: v1(121.806,40.561) 32.9@123.9,40.561
R331: 33.4 CON33.6 | length 3.4
  Top Layer w0.254: CON33.6@107.556,36.561 CON33.6@107.506,36.511 107.506,37.374 v1(108.091,37.959)
  Bottom Layer w0.254: 33.4@106.402,37.959 v1(108.091,37.959)
R332: 33.5 CON33.8 | length 4.2
  Top Layer w0.254: v1(104.606,38.561) 104.606,37.411 CON33.8@105.506,36.511
  Bottom Layer w0.254: v1(104.606,38.561) 104.654,38.609 33.5@106.402,38.609
R333: 33.6 CON33.5 | length 2.5
  Top Layer w0.254: v1(107.681,39.311) 107.681,39.611 108.031,39.961 CON33.5@108.506,39.961
  Bottom Layer w0.254: 33.6@106.402,39.259 v1@107.681,39.259
R334: 33.7 CON33.7 | length 2.3
  Top Layer w0.254: v1@105.316,39.961 CON33.7@106.506,39.961
  Bottom Layer w0.254: v1@105.316,39.909 33.7@106.402,39.909
  other v1: 105.316,39.921
R335: 33.12 CON33.2 | length 5.3
  Top Layer w0.254: CON33.2@111.506,36.511 113.621,38.626 v1(113.621,38.996)
  Bottom Layer w0.254: 33.12@111.802,38.609 112.484,38.609 112.871,38.996 v1(113.621,38.996)
R336: 33.11 CON33.4 | length 4.3
  Top Layer w0.254: CON33.4@109.506,36.511 v1(109.506,37.961)
  Bottom Layer w0.254: v1(109.506,37.961) 110.154,38.609 110.804,39.259 33.11@111.802,39.259